# Altium PCB PCB.PcbDoc
Units mil, origin at the board's own origin, x right, y up, seen from the top; angles counter-clockwise.
Board outline 2700 x 1850 mil, 2 copper layers (Top Layer, Bottom Layer), stack 62.8 mil thick; 22 components, 9 nets, 67 pads, 6 vias.
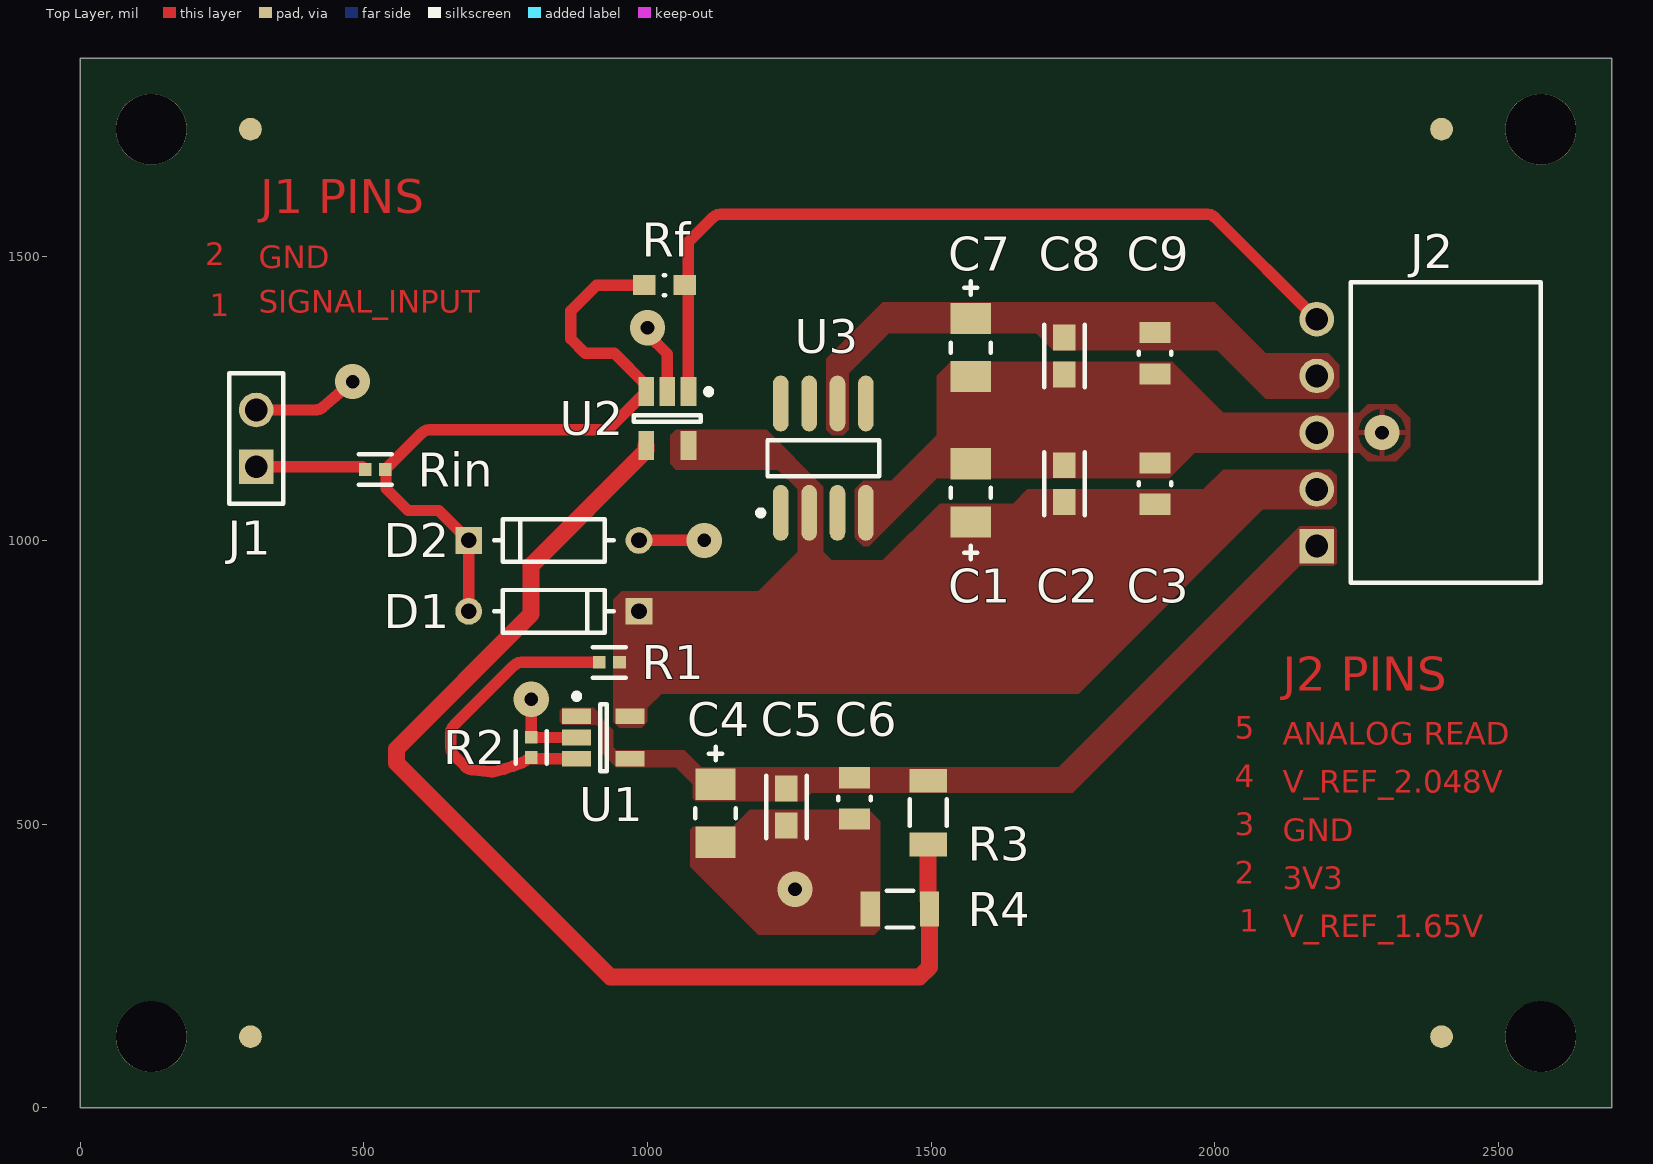
[diagram p0: Top Layer view]
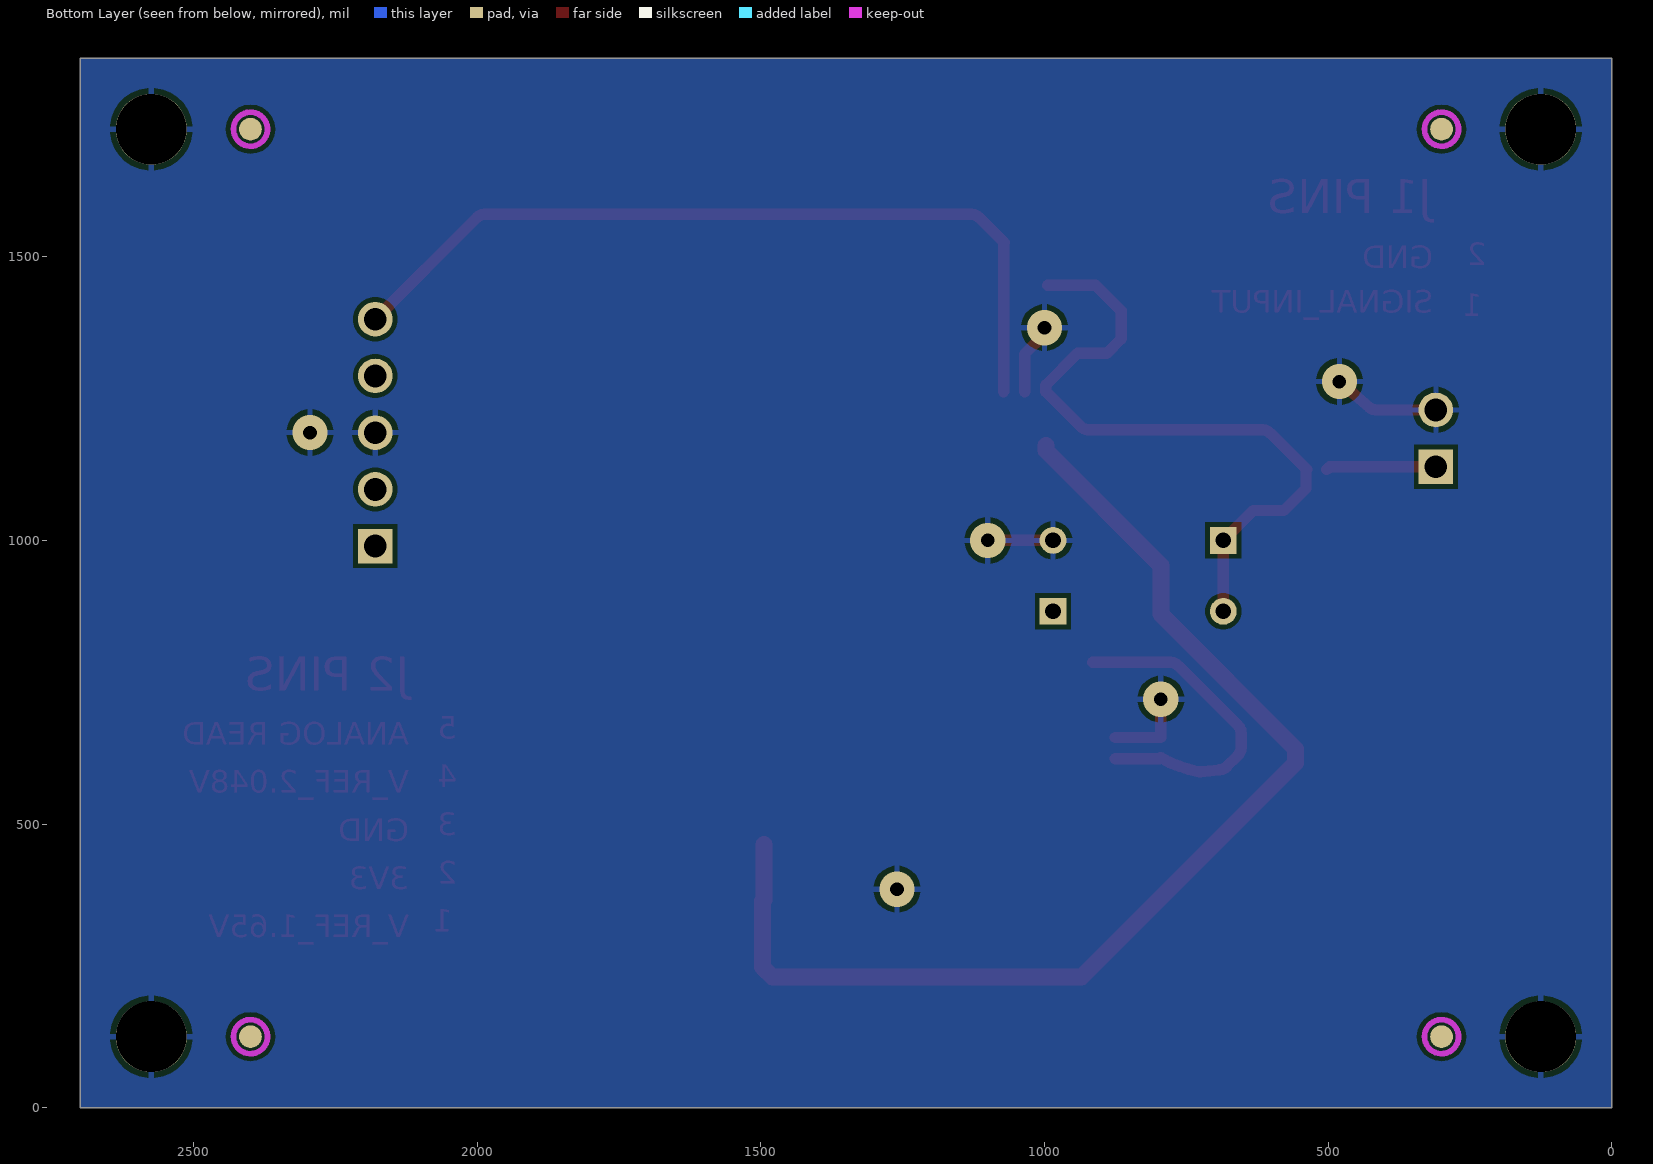
[diagram p1: Bottom Layer view, seen from below]
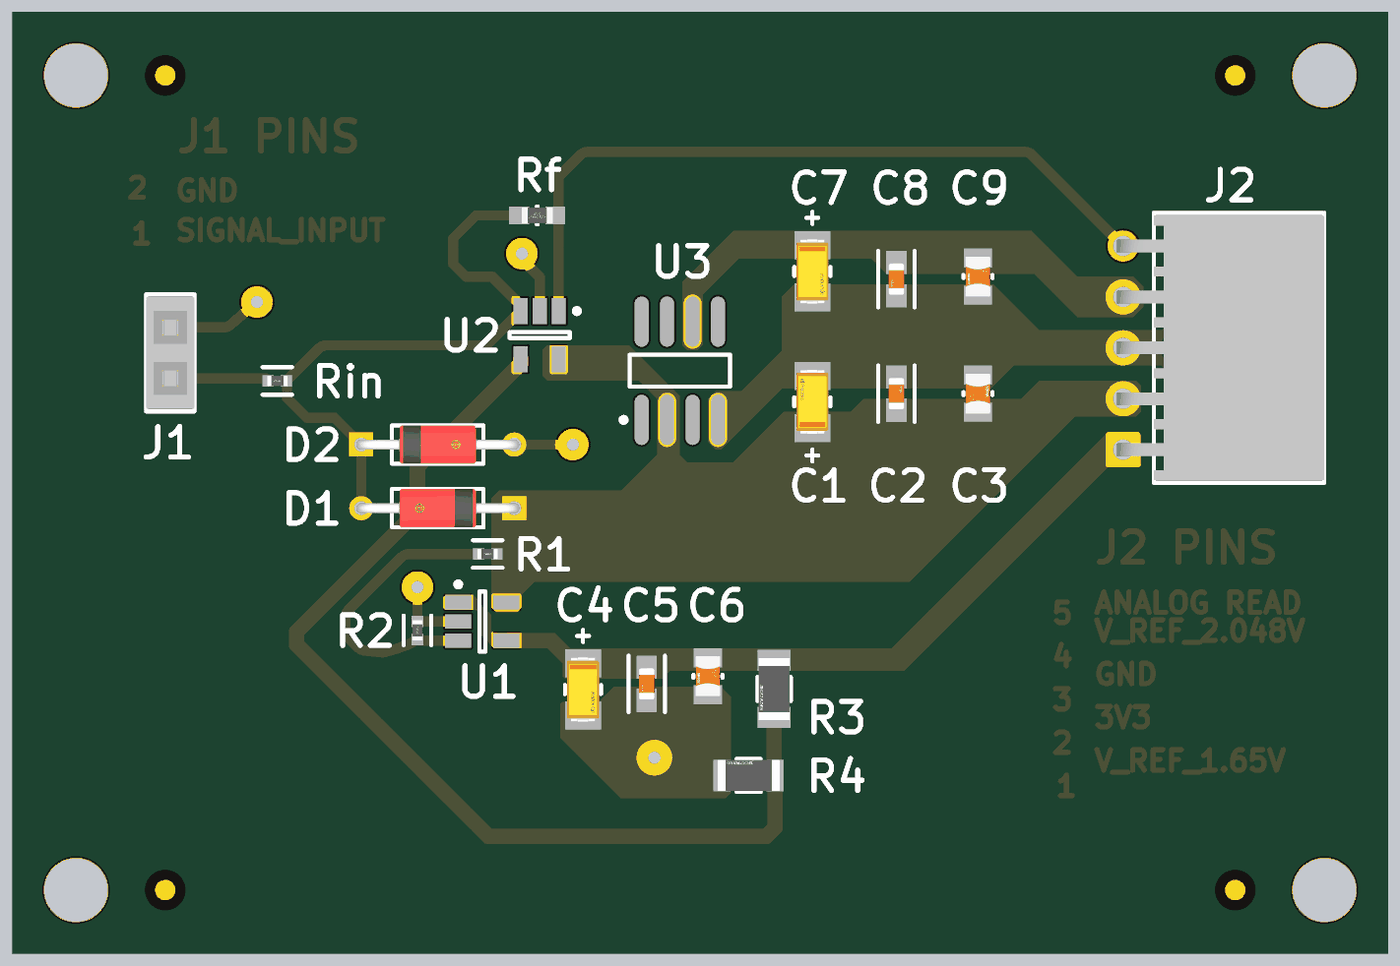
[diagram p2: 3D render of the assembled board from above, using the file's embedded part models]

## Layer stack, top to bottom
Top Solder: solder mask 0.4, Solder Resist, Dk 3.5
Top Layer: signal copper 1.4
Dielectric 1: dielectric 60, FR-4, Dk 4.8
Bottom Layer: signal copper 1.4
Bottom Solder: solder mask 0.4, Solder Resist, Dk 3.5

## Board outline
0,0 0,1850 2700,1850 2700,0

## Design rules (kind name [scope] priority, off if disabled: settings)
AssemblyTestpoint [All] p1: testpointundercomponent=TRUE minsize=40 maxsize=100 preferedsize=60 minholesize=0 maxholesize=40 preferedholesize=32 testpointgrid=1 usegrid=TRUE gridoriginx=2365 gridoriginy=1955 gridtolerance=0.01 allowsidetop=TRUE allowsidebottom=TRUE
Clearance Clearance_1 [OnMid vs OnMid] p1: gap=8 ignorepadtopadclearanceinfootprint=FALSE sourcerule=44 cellrowname=All cellrowtype=0 cellcolname=All cellcoltype=0 innerlayers=TRUE
Clearance Clearance_2 [(ExistsOnLayer('Top Layer') Or ExistsOnLayer('Bottom Layer')) vs (ExistsOnLayer('Top Layer') Or ExistsOnLayer('Bottom Layer'))] p2: gap=8 ignorepadtopadclearanceinfootprint=FALSE except(5: Arc-THPad Track-THPad THPad-Text) sourcerule=44 cellrowname=All cellrowtype=0 cellcolname=All cellcoltype=0 outerlayers=TRUE
Clearance [All] p3: gap=10 ignorepadtopadclearanceinfootprint=FALSE ismatrix=TRUE
FabricationTestpoint [All] p1: side=3 testpointundercomponent=TRUE minsize=40 maxsize=100 preferedsize=60 minholesize=0 maxholesize=40 preferedholesize=32 testpointgrid=1 allowsidetop=TRUE allowsidebottom=TRUE usegrid=TRUE gridoriginx=2365 gridoriginy=1955 gridtolerance=0.01
HoleSize [All] p1: absolutevalues=TRUE maxlimit=125 minlimit=1 maxpercent=80.000 minpercent=20.000
MinimumSolderMaskSliver [All] p1: minsoldermaskwidth=1
PolygonConnect PolygonConnect_1 [All vs IsNamedPolygon('3V3_L01_P003')] p1: connectstyle=Direct reliefconductorwidth=10 reliefentries=4 polygonreliefangle="90 Angle" airgapwidth=10
PolygonConnect [All] p2: connectstyle=Relief reliefconductorwidth=10 reliefentries=4 polygonreliefangle="90 Angle" airgapwidth=10
RoutingVias [All] p1: holewidth=28 width=50 viastyle="Through Hole" minholewidth=28 minwidth=50 maxholewidth=28 maxwidth=50
SilkToSolderMaskClearance [IsPad] p1: minsilkscreentomaskgap=7 clearancetoexposedcopper=TRUE
SolderMaskExpansion [All] p1: expansion=4 istentingtop=FALSE
SupplyNets "Schematic Supply Nets_5" [InNet('GND')] p1: voltage=0.000
SupplyNets "Schematic Supply Nets_4" [InNet('V_REF_2.048V')] p2: voltage=0.000
SupplyNets "Schematic Supply Nets_3" [InNet('3V3')] p3: voltage=0.000
SupplyNets "Schematic Supply Nets_2" [InNet('ANALOG_READ')] p4: voltage=0.000
SupplyNets "Schematic Supply Nets_1" [InNet('SIGNAL_INPUT')] p5: voltage=0.000
SupplyNets "Schematic Supply Nets" [InNet('V_REF_1.65V')] p6: voltage=0.000
Width MaxMinWidth_1 [InxNetClass('All xNets')] p1: maxlimit=30 minlimit=10 preferedwidth=20 minimp=50.000000 maximp=50.000000 favimp=50.000000
Width [All] p2: maxlimit=30 minlimit=20 preferedwidth=20 minimp=50.000000 maximp=50.000000 favimp=50.000000
25 further rules are at their usual default settings.

## Classes and differential pairs
component class Reference_Voltage_2V048: C7 C8 C9 U3
component class Reference_Voltage_1V65: C4 C5 C6 R1 R2 U1
component class Differential_Opamp: D1 D2 R3 R4 Rf Rin U2
component class Analog_Front_End: C1 C2 C3 J1 J2

## Components (designator, comment, footprint, x,y, rotation, side; value= is the part's Value field where it differs from the comment)
C1 "4.7u" FP-TAJA-MFG 1570,1083.82 r270 top
C2 "0.47u" FP-GCM188-0_1-IPC_A 1735,1100 r90 top
C3 "4.7n" FP-CC0805-0_85-MFG 1895,1100 r90 top value="47 nF"
C4 "4.7u" FP-TAJA-MFG 1120,518.82 r90 top
C5 "0.47u" FP-GCM188-0_1-IPC_A 1245,530 r270 top
C6 "4.7n" FP-CC0805-0_85-MFG 1365,545 r270 top value="47 nF"
C7 "4.7u" FP-TAJA-MFG 1570,1340 r90 top
C8 "0.47u" FP-GCM188-0_1-IPC_A 1735,1325 r270 top
C9 "4.7n" FP-CC0805-0_85-MFG 1895,1330 r270 top value="47 nF"
D1 "1N4148" FP-017AG-MFG 834.88,875 r180 top
D2 "1N4148" FP-017AG-MFG 834.88,1000 r0 top
J1 "SSQ-102-01-G-S" SMTC-SSQ-102-01-X-S 310,1130 r90 top
J2 "SSQ-105-02-G-S-RA" SMTC-SSQ-105-02-X-S-RA 2180,990 r90 top
R1 "1M" FP-MCR01-IPC_B 932.84,785 r180 top
R2 "1M" FP-MCR01-IPC_B 795,635 r90 top
R3 "47K" FP-CR1206-IPC_B 1495,520 r270 top
R4 "470K" FP-CR1206-IPC_C 1445,350 r180 top
Rf "100K" FP-RP73P-1J-MFG 1030,1450 r0 top value=100KΩ
Rin "1M" FP-MCR01-IPC_B 520,1125 r0 top
U1 "AD8605ARTZ-REEL7" ADI-RJ-5_M 922.24,652.4 r0 top
U2 "AD8091ARTZ-R7" ADI-RJ-5_M 1035,1215 r270 top
U3 "ADR4520ARZ" ADI-R-8_M 1310,1145 r90 top

## Footprints (in the part's own frame and the unit in brackets; to place one, negate y for a bottom-side part, rotate by r counter-clockwise, add the part's x,y. Pads: shape width x height; smd on the part's side, far side on the other; paste and mask are expansions set on the pad)
ADI-R-8_M [mm] "SOIC, 8-Leads, Body 4.9x3.9mm, Pitch 1.27mm, IPC Low Density"
  oval 2.5x0.7 smd: 1(-2.45,1.905) 2(-2.45,0.635) 3(-2.45,-0.635) 4(-2.45,-1.905) 5(2.45,-1.905) 6(2.45,-0.635) 7(2.45,0.635) 8(2.45,1.905)
  silkscreen extent -2.57,-2.5 0.8,2.93, body extent -2,-2.5 2,2.5, height 1.75
ADI-RJ-5_M [mm] "SOT-23, 5-Leads, Body 2.9x1.6mm, Pitch 0.95mm, IPC Low Density"
  rect 1.3x0.7 smd: 1(-1.2,0.95) 2(-1.2,0) 3(-1.2,-0.95) 4(1.2,-0.95) 5(1.2,0.95)
  silkscreen extent -1.32,-1.5 0.15,1.97, body extent -0.85,-1.5 0.85,1.5, height 1.45
FP-017AG-MFG [mm]
  rect 1.2x1.2 hole 0.7 paste-2539.97 mask+0: 1(-3.813,0)
  round 1.2 hole 0.7 paste-2539.97 mask+0: 2(3.813,0)
  silkscreen extent -2.68,-0.95 2.68,0.95, body extent -4.51,-1.05 4.51,1.05, height 0.25
FP-CC0805-0_85-MFG [mm]
  rect 0.95x1.4 smd paste+0 mask+0: 1(-0.925,0) 2(0.925,0)
  silkscreen extent -0.08,-0.72 0.08,0.72, body extent -1.6,-1.05 1.6,1.05, height 0.25
FP-CR1206-IPC_B [mil]
  rect 41.66x65.44 smd paste+0 mask+0: 1(-56.18,0) 2(56.18,0)
  silkscreen extent -24,-33 24,33, body extent -87,-43 87,43, height 10
FP-CR1206-IPC_C [mil]
  rect 33.79x61.5 smd paste+0 mask+0: 1(-52.24,0) 2(52.24,0)
  silkscreen extent -24,-32 24,32, body extent -73,-36 73,36, height 10
FP-GCM188-0_1-IPC_A [mil]
  rect 45.62x39.85 smd paste+0 mask+0: 1(-32.55,0) 2(32.55,0)
  silkscreen extent -55,-36 55,36, body extent -75,-40 75,40, height 10
FP-MCR01-IPC_B [mil]
  rect 22.3x22.54 smd paste+0 mask+0: 1(-17.84,0) 2(17.84,0)
  silkscreen extent -29,-27 29,27, body extent -35,-17 35,17, height 10
FP-RP73P-1J-MFG [mm]
  rect 1x0.9 smd paste+0 mask+0: 1(-0.9,0) 2(0.9,0)
  silkscreen extent -0.03,-0.45 0.03,0.45, body extent -1.5,-0.55 1.5,0.55, height 0.25
FP-TAJA-MFG [mm]
  rect 1.4x1.8 smd paste+0 mask+0: 1(-1.3,0) 2(1.3,0)
  silkscreen extent -0.23,-0.9 2.98,0.9, body extent -2.1,-1 2.1,1, height 0.25
SMTC-SSQ-102-01-X-S [mm] "SQ Post Socket, 1x2 Pins, Vertical, 2.54mm Pitch, Female"
  rect 1.55x1.55 hole 1.02: 1(0,0)
  round 1.55 hole 1.02: 2(2.54,0)
  silkscreen extent -1.65,-1.2 4.19,1.2, body extent -1.52,-1.21 4.06,1.21, height 8.51
SMTC-SSQ-105-02-X-S-RA [mm] "SQ Post Socket, 1x5 Pins, Right Angle, 2.54mm Pitch, Female"
  rect 1.55x1.55 hole 1.02: 1(0,0)
  round 1.55 hole 1.02: 2(2.54,0) 3(5.08,0) 4(7.62,0) 5(10.16,0)
  silkscreen extent -1.65,-10.03 11.81,-1.52, body extent -1.52,-10.03 11.68,0.32, height 2.41

## Part data
C1 C4 C7: library part CMP-04424-000323-2, "4.7uF 20V  ±10% 4Ω 1206  SMD Tantalum Capacitor", Capacitance=4.7µF, Case Code (Imperial)=1206, Case Code (Metric)=3216, Dielectric Material=Tantalum, ESR (Equivalent Series Resistance)=4Ω, Leakage Current=900nA, Max Operating Temperature=125°C, Min Operating Temperature=-55°C, Ripple Current=137mA, Tolerance=10%, Voltage=20V, Case/Package=1206, Depth=1.6mm, Dissipation Factor=6%, Features="General Purpose", Height=1.6mm, Height - Seated (Max)=1.8034mm, Lead Free="Lead Free", Lead Pitch=1.1mm, Length=3.2mm, Life (Hours)=2000hours, Lifecycle Status=Production, Mount="PCB, Surface Mount", NexarPartId=39985789, Number of Pins=2, Packaging="Cut Tape (CT)", Polarity=Polar, Q Factor=6, Radiation Hardening=No, REACH SVHC="No SVHC", RoHS=Compliant, Schedule B=8532210050, Termination=SMD/SMT, Voltage Rating=20V, Voltage Rating (DC)=20V, Width=1.6mm
C2 C5 C8: library part CMP-2006-02360-2, "Ceramic Capacitor for Automotive 470nF  ±10% 16VDC X7R 0603 Paper T/R", Capacitance=470nF, Case Code (Imperial)=0603, Case Code (Metric)=1608, Dielectric=X7R, Max Operating Temperature=125°C, Min Operating Temperature=-55°C, Package Quantity=1, Ratings=AEC-Q200, Tolerance=10%, Voltage=16V, Case/Package=0603, Depth=0.8mm, Height=0.8mm, Lead Free="Lead Free", Length=1.6mm, Mount="Surface Mount", Packaging="Tape and Reel", Radiation Hardening=No, REACH SVHC="No SVHC", Termination=SMD/SMT, Thickness=0.035inch, Voltage Rating=16V, Voltage Rating (DC)=16V, Width=0.8mm
C3 C6 C9: library part CMP-03422-000052-1, "CAP CER 0.047UF 50V X7R 0805", Capacitance="47 nF", Manufacturer=Yageo, Manufacturer Part Number=CC0805KRX7R9BB473, Package=CC0805-0.85, Temperature="-30°C to +85°C", Temperature Characteristic=X7R, Temperature Range High=+85°C, Temperature Range Low=-30°C, Tolerance=0.1, Voltage Rating="50 V", Automotive=No, Category=Cap, ComponentLink2Description=Datasheet, ComponentLink2URL=http://www.yageo.com/documents/recent/UPY-GPHC_Y5V_6.3V-to-50V_8.pdf, Device Class L1="Passive Components", Device Class L2=Capacitors, Device Class L3="Ceramic Capacitors", Digikey Description="CAP CER 0.047UF 50V X7R 0805", Footprint Url=http://www.yageo.com/exep/pages/download/literatures/UPY-C_GEN_24.pdf, Height=0.95mm, Ipc Land Pattern Name=CAPC200125X85, Lead Free=Yes, Material=Ceramic, Mouser Description="Multilayer Ceramic Capacitors MLCC - SMD/SMT 47nF 50V X7R 10%", Octopart=https://octopart.com/cc0805krx7r9bb473-yageo-42181304, RoHS=TRUE
D1 D2: library part CMP-07163-000046-1, "DIODE GEN PURP 100V 200MA DO35", Average Rectified Current=200mA, Capacitance=4pF, Case/Package=DO-35, Current=4A, Forward Current=300mA, Forward Voltage=1V, Max Forward Surge Current (Ifsm)=1A, Max Operating Temperature=175°C, Max Power Dissipation=500mW, Max Repetitive Reverse Voltage (Vrrm)=100V, Max Reverse Current=5uA, Min Operating Temperature=-65°C, Package Quantity=2000, Contact Plating=Tin, Current Rating=200mA, Diameter=1.91mm, Element Configuration=Single, Height=4.56mm, Lead Free="Lead Free", Length=4.56mm, Max Reverse Voltage (DC)=100V, Max Surge Current=4A, Mount="Through Hole", Number of Pins=2, Output Current=200mA, Outside Diameter=1.85mm, Packaging=Bulk, Peak Non-Repetitive Surge Current=4A, Polarity=Standard, Power Dissipation=500mW, Radiation Hardening=No, REACH SVHC="No SVHC", Recovery Time=4ns, Reverse Recovery Time=4ns, Reverse Voltage=100V, Series=-, Voltage=100V, Voltage Rating (DC)=100V, Weight=0.01lb, Width=1.91mm
J1: library part CMP-1023-00275-1, "SQ Post Socket, Through-hole, Vertical, -55 to 125 degC, 2.54 mm Pitch, 2-Pin, Female, RoHS", Manufacturer=Samtec, Temperature Range="-55 to 125 degC", ComponentLink1Description="Manufacturer URL", ComponentLink1URL=http://www.samtec.com, ComponentLink2Description=Datasheet, ComponentLink2URL=http://www.samtec.com/documents/webfiles/pdf/SSQ_TH.PDF, ComponentLink3Description="Package Specification", ComponentLink3URL=http://www.samtec.com/documents/webfiles/cpdf/SSQ-1XX-XX-XXX-X-XX-XXX-XX-X-MKT.pdf, DatasheetVersion=F-214, Mounting Technology=Through-hole, Orientation=Vertical, PackageDescription="Assembly, Socket Strip .025[0.64] SQ Tail", PackageReference=SSQ-102-01-X-S, PackageVersion="BD, 6/1987", PartNumber=SSQ-102-01-G-S, Pitch="2.54 mm", RoHS=True
J2: library part CMP-1023-00280-1, "SQ Post Socket, Through-hole, Right Angle, -55 to 125 degC, 2.54 mm Pitch, 5-Pin, Female, RoHS", Manufacturer=Samtec, Temperature Range="-55 to 125 degC", ComponentLink1Description="Manufacturer URL", ComponentLink1URL=http://www.samtec.com, ComponentLink2Description=Datasheet, ComponentLink2URL=http://www.samtec.com/documents/webfiles/pdf/SSQ_TH.PDF, ComponentLink3Description="Package Specification", ComponentLink3URL=http://www.samtec.com/documents/webfiles/cpdf/SSQ-1XX-XX-XXX-X-XX-XXX-XX-X-MKT.pdf, DatasheetVersion=F-214, Mounting Technology=Through-hole, Orientation="Right Angle", PackageDescription="Assembly, Socket Strip .025[0.64] SQ Tail", PackageReference=SSQ-105-02-X-S-RA, PackageVersion="BD, 6/1987", PartNumber=SSQ-105-02-G-S-RA, Pitch="2.54 mm", RoHS=True
R1 R2 Rin: library part CMP-08839-008209-1, "Thick Film Chip Resistor, 0402, 1MΩ, 0.5%, 50ppm/°C, 0.063W, 50V", Case/Package=0402, Power Rating=63mW, Resistance=1MR, Voltage Rating (DC)=50V, RoHS Compliant=Yes
R3: library part CMP-07231-000888-1, "Thick Film Chip Resistors 1206 47kΩ 0.25W 1% 100ppm/°C", Case Code (Imperial)=1206, Case Code (Metric)=3216, Max Operating Temperature=155°C, Max Power Dissipation=250mW, Min Operating Temperature=-55°C, Package Quantity=1, Resistance=47kR, Temperature Coefficient=100ppm/°C, Tolerance=1%, Voltage Rating=200V, Case/Package=1206, Composition="Thick Film", Contact Plating=Tin, Depth=1.6mm, Features="Moisture Resistant", Height=0.03inch, Length=3.2mm, Military Standard=Not, Mount="Surface Mount", Number of Terminations=2, Packaging="Tape and Reel", Power Rating=250mW, Radiation Hardening=No, REACH SVHC="No SVHC", Termination=SMD/SMT, Thickness=610um, Voltage Rating (DC)=200V, Width=1.6mm
R4: library part CMP-07231-003544-1, "Thick Film Chip Resistors 1206 470kΩ 0.25W 1% 100ppm/°C", Case Code (Imperial)=1206, Case Code (Metric)=3216, Max Operating Temperature=155°C, Max Power Dissipation=250mW, Min Operating Temperature=-55°C, Package Quantity=5000, Resistance=470kR, Temperature Coefficient=100ppm/°C, Tolerance=1%, Voltage Rating=200V, Case/Package=1206, Composition="Thick Film", Contact Plating=Tin, Depth=1.6mm, Height=0.03inch, Length=3.2mm, Military Standard=Not, Mount="Surface Mount", Number of Terminations=2, Packaging="Tape and Reel", Power Rating=250mW, Radiation Hardening=No, Termination=SMD/SMT, Thickness=610um, Width=1.6mm
Rf: library part CMP-03211-000104-1, "RES SMD 100K OHM 0.1% 1/6W 0603", Manufacturer="TE Connectivity", Manufacturer Part Number=RP73PF1J100KBTDF, Package=RP73P-1J, Power Rating=0.166W, Resistance=100KΩ, Temperature="-55°C to +155°C", Temperature Coefficient=25ppm/°C, Temperature Range High=+155°C, Temperature Range Low=-55°C, Tolerance=0.001, Voltage Rating=100V, Automotive=No, Category=Res, ComponentLink2Description=Datasheet, ComponentLink2URL=https://www.te.com/commerce/DocumentDelivery/DDEController?Action=srchrtrv&DocNm=1773272&DocType=DS&DocLang=English, Composition="Thin Film", Device Class L1="Passive Components", Device Class L2=Resistors, Device Class L3="Chip SMD Resistors", Digikey Description="RES SMD 100K OHM 0.1% 1/6W 0603", Height=0.55mm, Ipc Land Pattern Name=RESC15580X45, Lead Free=Yes, Octopart=https://octopart.com/rp73pf1j100kbtdf-te+connectivity-23826702, RoHS=TRUE, Series=RP73P
U1: library part CMP-0384-01494-2, "Single Channel Wide Bandwidth Operational Amplifier, 10 MHz BW, 5 V/us SR, Industrial, 5-pin SOT23 (RJ-5), Reel", Amplifiers Per Package=1, Generic Part Number=AD8605, Input Bias Current=200fA, Input Offset Voltage=20uV, Manufacturer="Analog Devices", Code_JEDEC=MO-178-AA, ComponentLink1Description="Manufacturer URL", ComponentLink1URL=http://www.analog.com/en/index.html, ComponentLink2Description=Datasheet, ComponentLink2URL=http://www.analog.com/static/imported-files/data_sheets/AD8605_8606_8608.pdf, ComponentLink3Description="Package Specification", ComponentLink3URL=http://www.analog.com/static/imported-files/packages/PKG_PDF/SOT-23(RJ)/RJ_5.pdf, ComponentLink4Description="Reference Circuit", ComponentLink4URL=http://www.analog.com/en/all-operational-amplifiers-op-amps/operational-amplifiers-op-amps/ad8605/products/product.html#product-recommendations, DatasheetVersion="Rev. L", Iq/Amp=1.2mA, Mounting Technology="Surface Mount", PackageDescription="5-Pin Small Outline Transistor Package, Body 2.9 x 1.6 mm, Pitch 0.95 mm", PackageReference=RJ-5, PackageVersion=121608-A, PartNumber=AD8605ARTZ-REEL7, RevisionNote="Reference Circuit URL fixed", Slew Rate=5V/us, Small Signal Bandwidth=10MHz, V Span Max=6V, V Span Min=2.7V
U2: library part CMP-0384-01537-2, "Single Channel Single-Supply Operation Operational Amplifier, 110 MHz BW, 170 V/us SR, Industrial, 5-pin SOT23 (RJ-5), Reel", Amplifiers Per Package=1, Generic Part Number=AD8091, Input Bias Current=1.3uA, Input Offset Voltage=1.6mV, Manufacturer="Analog Devices", Code_JEDEC=MO-178-AA, ComponentLink1Description="Manufacturer URL", ComponentLink1URL=http://www.analog.com/en/index.html, ComponentLink2Description=Datasheet, ComponentLink2URL=http://www.analog.com/static/imported-files/data_sheets/AD8091_8092.pdf, ComponentLink3Description="Package Specification", ComponentLink3URL=http://www.analog.com/static/imported-files/packages/PKG_PDF/SOT-23(RJ)/RJ_5.pdf, DatasheetVersion="Rev. C", Iq/Amp=5.5mA, Mounting Technology="Surface Mount", PackageDescription="5-Pin Small Outline Transistor Package, Body 2.9 x 1.6 mm, Pitch 0.95 mm", PackageReference=RJ-5, PackageVersion=121608-A, PartNumber=AD8091ARTZ-R7, RevisionNote="Symbol corrected, Pin 2 orientation reversed", Slew Rate=170V/us, Small Signal Bandwidth=110MHz, V Span Max=12V, V Span Min=3V
U3: library part CMP-0784-00292-1, "Ultralow Noise, High Accuracy Voltage Reference, 2.048 V Output, 3 to 15 V Supply, Industrial, 8-pin SOIC (R-8), Tube", Manufacturer="Analog Devices", Operating Temp Range="-40 to 125 degC", Code_JEDEC=MS-012-AA, ComponentLink1Description="Manufacturer URL", ComponentLink1URL=http://www.analog.com/en/index.html, ComponentLink2Description=Datasheet, ComponentLink2URL=http://www.analog.com/static/imported-files/data_sheets/ADR4520_4525_4530_4533_4540_4550.pdf, ComponentLink3Description="Package Specification", ComponentLink3URL=http://www.analog.com/static/imported-files/packages/PKG_PDF/SOIC_Narrow%20(R)/R_8.pdf, ComponentLink4Description="URL Link1", ComponentLink4URL="Product URL:http://www.analog.com/en/special-linear-functions/voltage-references/adr4520/products/product.html", DatasheetVersion="Rev. 0", Max V Supply (V)=15, Min V Supply (V)=3, Mounting Technology="Surface Mount", PackageDescription="8-Pin Standard Small Outline Package, Body 4.9 x 3.9 mm, Pitch 1.27 mm", PackageReference=R-8, PackageVersion="060506-A, 06/2006", Packing=Tube, PartNumber=ADR4520ARZ, Ref Out TC (ppm/C)=4, Vout=2.048V

## Free pads (board coordinates)
  round 40 all layers, no hole mask+20: 2(300,125) 2(300,1725) 2(2400,125) 2(2400,1725)
  round 125 hole 125: 3(125,125) 3(125,1725) 3(2575,125) 3(2575,1725)

## Via types
v1: diameter 62, hole 24, Top Layer to Bottom Layer, 6 vias

## Nets (pads, with @x,y where several pads share a name; then routed paths per layer and width w, separated by ;. In a path a pad name is that pad's centre, name@x,y a point inside that pad or via, vN(x,y) a via of type N, cw(c..) or ccw(c..) an arc to the next point about the centre after c; other vN are vias at no path point)
3V3: C1.2 C2.1 C3.1 D1.1 J2.2 R1.1 U1.5 U2.5 U3.2
ANALOG_READ: J2.5 Rf.2 U2.1 | length 1468.1
  Top Layer w20: U2.1 1071.63,1263.01 1071.63,1524.23 1070.87,1525 1115.01,1569.14 cw(c1129.15,1555) 1129.15,1575 1986.72,1575 cw(c1986.72,1555) 2000.86,1569.14 J2.5
GND: C1.1 C2.2 C3.2 C4.1 C5.2 C6.2 C7.1 C8.2 C9.2 D2.2 J1.2 J2.3 pad.3 R2.2 R4.2 U1.2 U2.2 U3.4 | length 577.5
  Top Layer w20: J1.2 414.59,1230 ccw(c414.59,1250) 427.65,1234.85 v1(480,1280) ; v1(795,720) R2.2 795.22,652.62 874.78,652.62 U1.2 ; D2.2 v1(1100,1000) ; v1(1000,1375) 1000,1363.63 1035,1328.63 U2.2
  other v1: 1260,385 2295,1190
NetD1_2: D1.2 D2.1 Rf.1 Rin.2 U2.3 | length 1233.5
  Top Layer w20: Rin.2 538.99,1123.85 538.99,1091.72 578.03,1052.67 632.09,1052.67 D2.1 D1.2 ; Rin.2@537.84,1125.12 538.99,1126.27 539.1,1126.27 601.98,1189.14 cw(c616.12,1175) 616.12,1195 922.07,1195 ccw(c922.07,1215) 936.21,1200.86 U2.3 997.6,1274.06 941.65,1330 890,1330 865,1355 865,1405 910,1450 Rf.1
NetR1_2: R1.2 R2.1 U1.3 | length 588.8
  Top Layer w20: R2.1 793.73,616.39 786.68,612.46 ccw(c796.47,595.02) 786.56,612.39 779.9,608.62 cw(c770.08,626.04) 777.65,607.53 cw(c649.88,922.96) 731.14,592.48 731.07,592.46 cw(c726.37,611.9) 724.34,592 690.97,595.4 cw(c692.99,615.29) 678.85,601.15 659.11,620.89 cw(c673.28,635) 653.28,634.94 653.28,660 cw(c673.28,660) 659.11,674.11 764.18,779.18 cw(c778.28,765) 778.28,785 R1.2 ; R2.1@795.12,617.16 797.28,615 U1.3
NetR3_2: R3.2 R4.1 U2.4 | length 2063.2
  Top Layer w30: U2.4 997.6,1158.39 795,955.79 795,870 557.43,632.43 557.43,607.57 935,230 1479.67,230 1497.24,247.57 R4.1 1497.24,363.86 1495,366.1 R3.2
SIGNAL_INPUT: J1.1 Rin.1 | length 194.3
  Top Layer w20: J1.1 497.16,1130 500.9,1126.27 501.01,1126.27 502.16,1125.12 Rin.1
V_REF_1.65V: C4.2 C5.1 C6.1 J2.1 R3.1 U1.1 U1.4
V_REF_2.048V: C7.2 C8.1 C9.1 J2.4 U3.6
pads on no net: U3.1 U3.3 U3.5 U3.7 U3.8

## Polygon pours and split planes (outlines as drawn)
V_REF_1.65V on Top Layer "V_REF_1.65V_L01_P004" (solid, remove dead copper, pour order 4): 915,630 915,670 910,675 850,675 845,680 845,700 850,705 905,705 915,695 915,690 940,665 940,635 945,630 1065,630 1095,600 1725,600 2150,1025 2210,1025 2215,1020 2215,960 2210,955 2150,955 1750,555 1290,555 1275,540 1085,540 1080,545 1080,570 1050,600 945,600
GND on Top Layer "GND_L01_P007" (solid, remove dead copper, pour order 7): 1195,305 1400,305 1410,315 1410,505 1390,525 1180,525 1150,495 1080,495 1075,490 1075,425
V_REF_2.048V on Top Layer "V_REF_2.048V_L01_P006" (solid, remove dead copper, pour order 6): 2220,1270 2220,1310 2200,1330 2090,1330 2000,1420 1415,1420 1315,1320 1315,1195 1325,1185 1345,1185 1355,1195 1355,1295 1425,1365 1685,1365 1715,1335 2005,1335 2090,1250 2200,1250
GND on Top Layer "GND_L01_P005" (solid, remove dead copper, pour order 5): 2255,1225 2270,1240 2320,1240 2345,1215 2345,1165 2320,1140 2270,1140 2255,1155 1965,1155 1920,1110 1510,1110 1390,990 1380,990 1365,1005 1365,1090 1380,1105 1430,1105 1510,1185 1510,1290 1535,1315 1925,1315 2015,1225
3V3 on Top Layer "3V3_L01_P003" (solid, pour order 3): 940,680 950,670 990,670 1000,680 1000,705 1025,730 1195,730 1760,730 2085,1055 2205,1055 2215,1065 2215,1115 2205,1125 2015,1125 1980,1090 1670,1090 1645,1065 1515,1065 1415,965 1325,965 1310,980 1310,1095 1210,1195 1050,1195 1040,1185 1040,1135 1050,1125 1230,1125 1265,1090 1265,980 1195,910 955,910 940,895 940,775
GND on Bottom Layer "GND_L02_P000" (solid, pour order 0): 0,1850 0,0 2700,0 2700,1850

## Keep-outs
Bottom Layer:
  circle w10: c2400,125 r30
  circle w10: c2400,1725 r30
  circle w10: c300,1725 r30
  circle w10: c300,125 r30

## Other copper
Top Layer:
  text "J1 PINS" at 317,1577 h60
  text "2" at 220,1485 h40
  text "GND" at 315,1480 h40
  text "SIGNAL_INPUT" at 315,1401.66 h40
  text "1" at 228,1395 h40
  text "J2 PINS" at 2120,735 h60
  text "5" at 2035,650 h40
  text "ANALOG READ" at 2120,640 h40
  text "4" at 2035,565 h40
  text "V_REF_2.048V" at 2120,555 h40
  text "3" at 2035,480 h40
  text "GND" at 2120,470 h40
  text "2" at 2035,395 h40
  text "3V3" at 2120,385 h40
  text "1" at 2043,310 h40
  text "V_REF_1.65V" at 2120,300 h40